# EAGLE board 24dc_cup_wash_sucction - Copy (EAGLE 8.5.1)
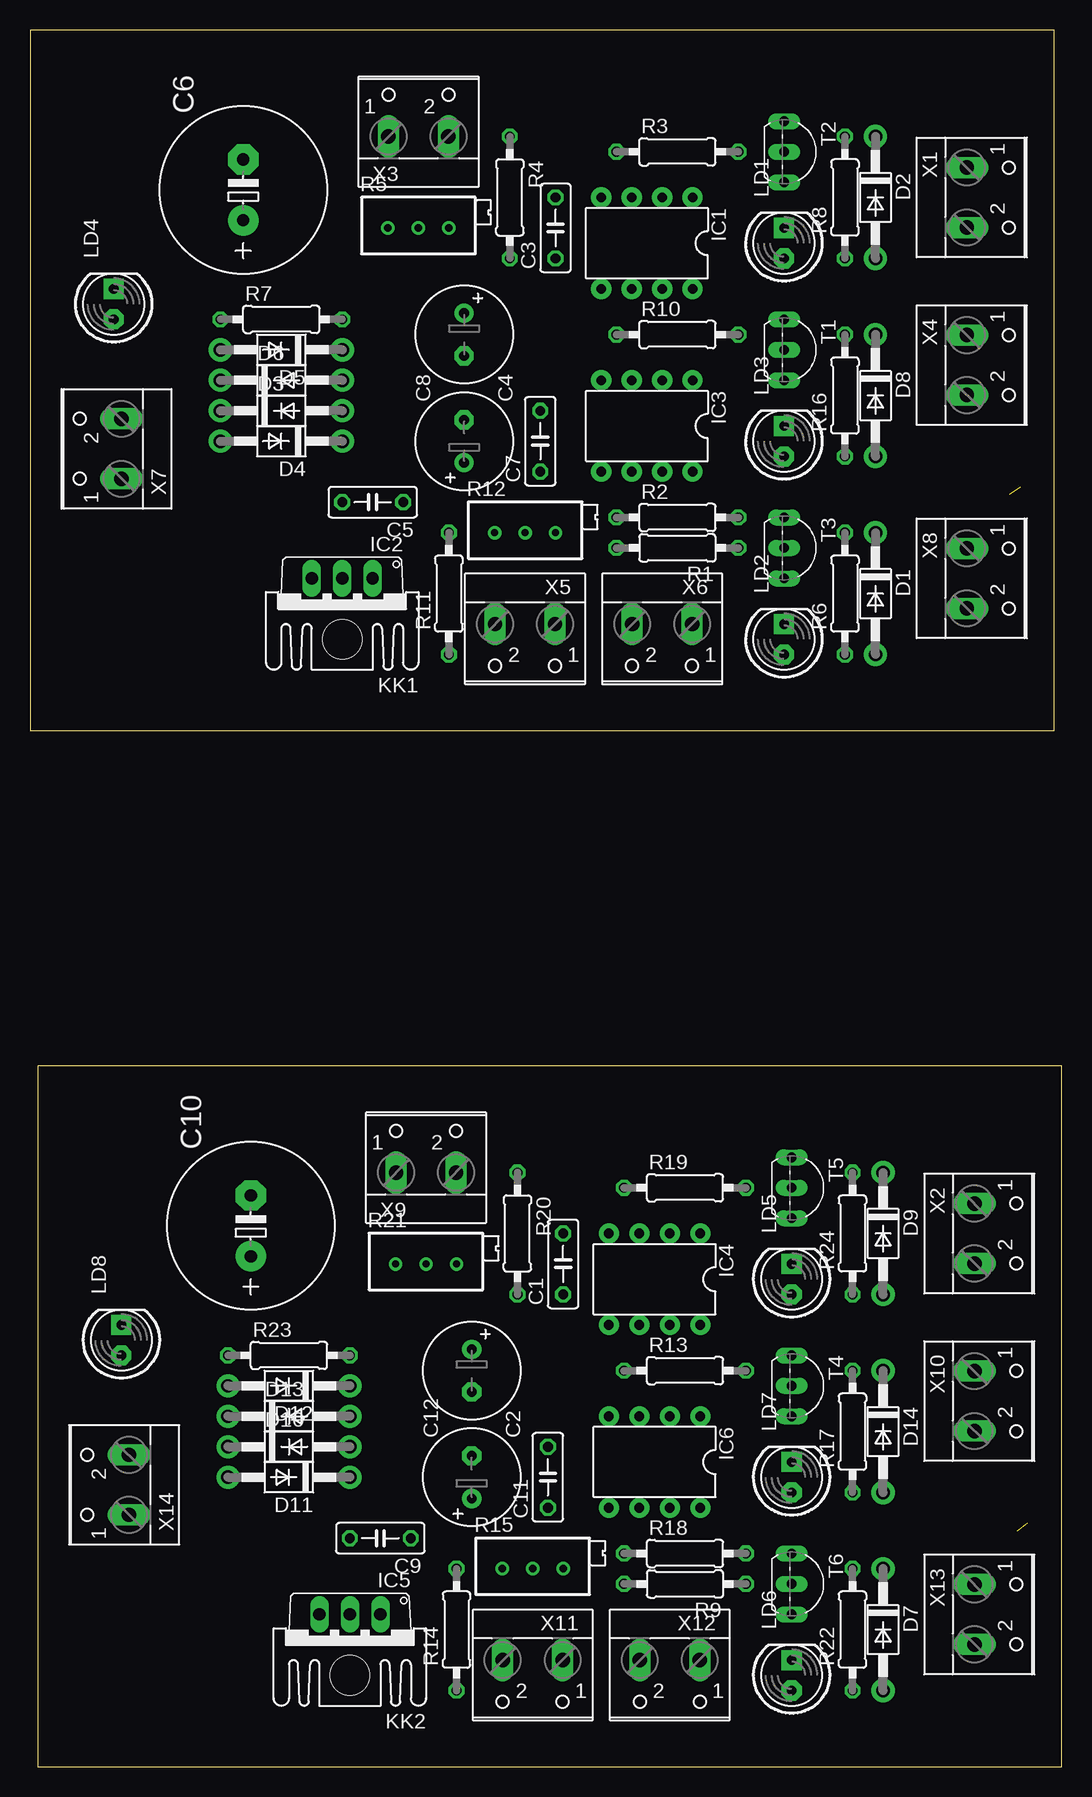
[diagram p0: board, top side]
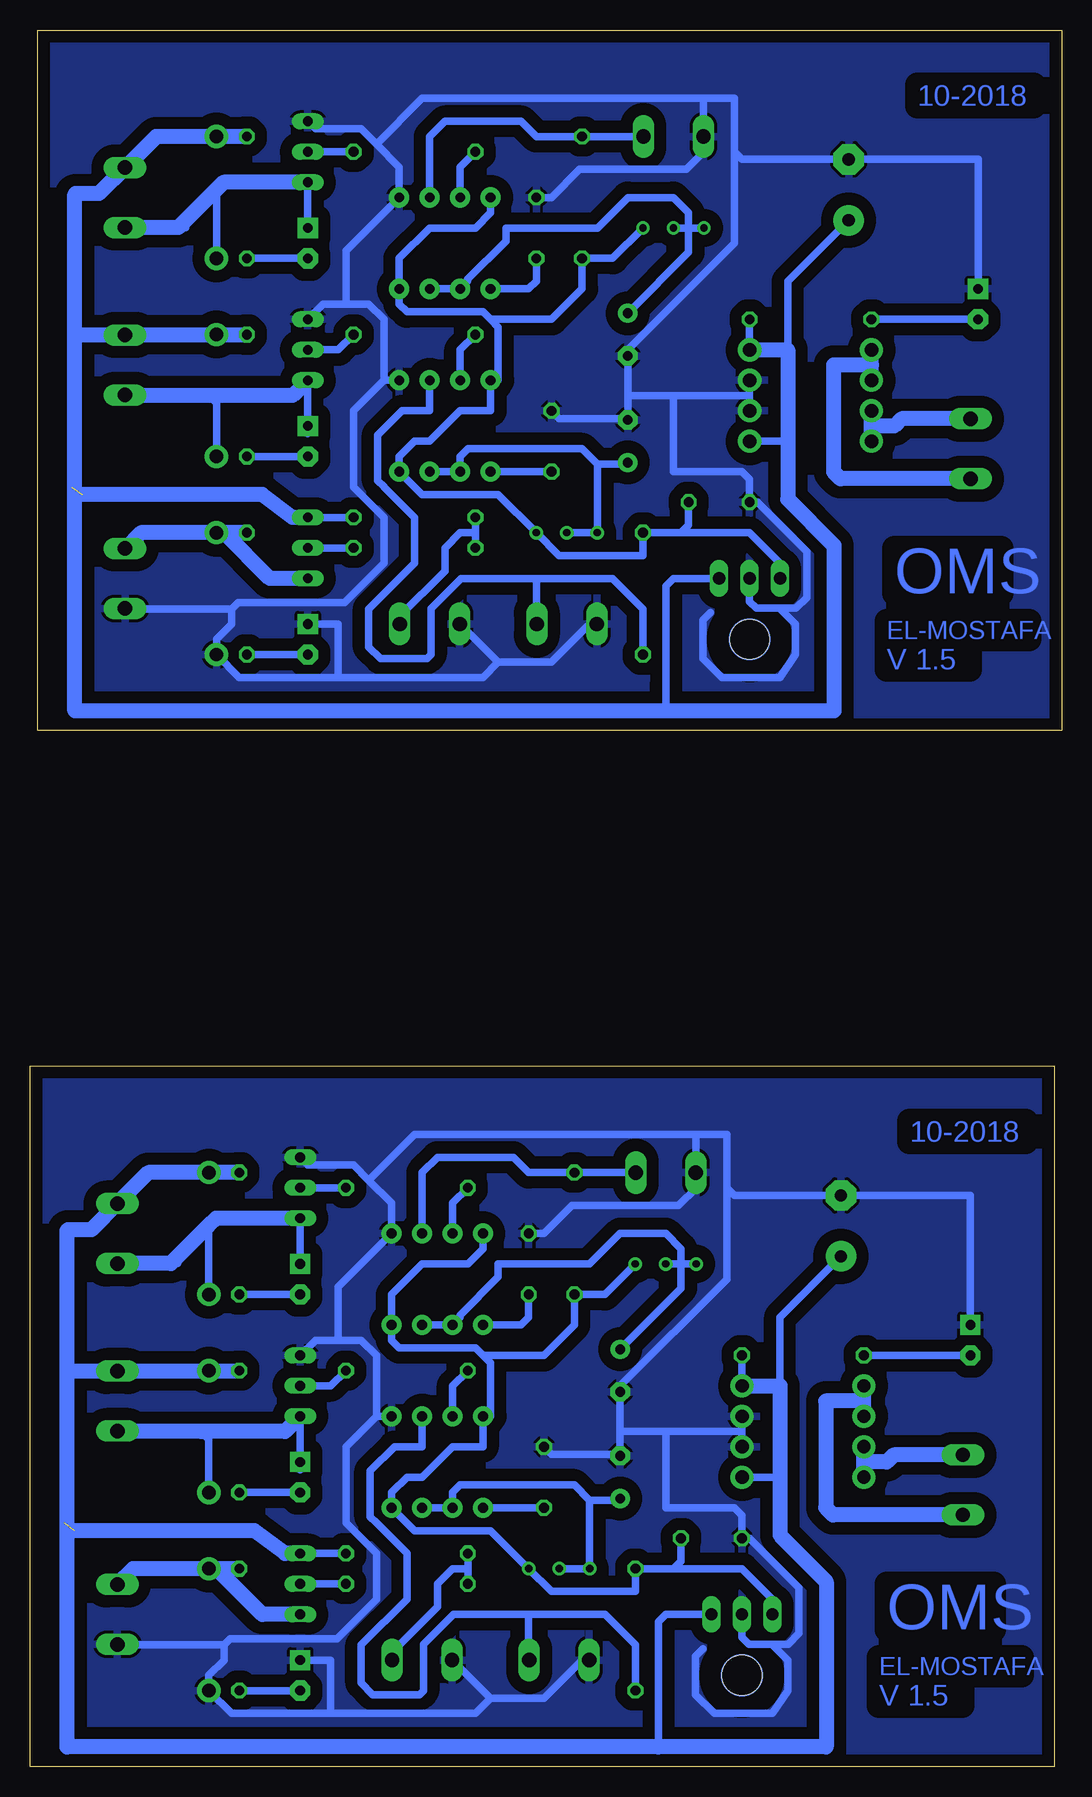
[diagram p1: board, bottom side, seen from below]

Size 86.03 x 144.77 mm. Coordinates in mm from the lower left corner, seen from the top.
Outline: 0,86.36 85.39,86.36 85.39,144.77 0,144.77 0,86.36
Outline: 0.64,0 86.03,0 86.03,58.41 0.64,58.41 0.64,0
Copper layers (1*16): Top 0.035mm / dielectric 1.5mm / Bottom 0.035mm
Design rules "default *": minimum track width 25mil, minimum drill 0.35mm, track to track 40mil, track to pad 40mil, pad to pad 6mil, via to via 6mil, smd to smd 6mil, copper to edge 40mil, drill to drill 6mil, minimum pad ring 10mil, minimum via ring 8mil, stop-mask expansion 4mil, vias tented up to drill 0mil, thermal gap 10mil

## Footprints (pad centres in the part's own frame; a part is rotated, then mirrored left to right if it is on the bottom)
C050-025X075 = drill 0.813 octagon: 1 -2.54,0; 2 2.54,0
E3,5-8 = drill 0.813 pad 1.6: + -1.778,0 | drill 0.813 pad 1.6 octagon: - 1.778,0
E5-13 = drill 1.016 pad 2.54: + -2.54,0 | drill 1.016 pad 2.54 octagon: - 2.54,0
DO41-10 = drill 1.118 pad 1.93: A 5.08,0; C -5.08,0
DIL08-ROUND = drill 0.813 pad 1.676: 1 -3.81,-3.81; 2 -1.27,-3.81; 3 1.27,-3.81; 4 3.81,-3.81; 5 3.81,3.81; 6 1.27,3.81; 7 -1.27,3.81; 8 -3.81,3.81
TO220V = drill 1.016 long: 1 -2.54,-2.54; 2 0,-2.54; 3 2.54,-2.54
SK95-2M3 = hole 3.302: 0,2.54
LED5MM = drill 0.813 pad 1.676 octagon: A -1.27,0 | drill 0.813 pad 1.676 square: K 1.27,0
0207/10 = drill 0.813 octagon: 1 -5.08,0; 2 5.08,0
RTRIMT93XA = drill 0.61: 1 0,-2.54; 2 0,0; 3 0,2.54
TO92-EBC-OVAL = drill 0.813 long: B 0,-1.27; C 2.54,-1.27; E -2.54,-1.27
TO92-EBC = drill 0.813 long: B 0,-1.27; C 2.54,-1.27; E -2.54,-1.27
W237-102 = drill 1.194 long: 1 -2.5,-1.27; 2 2.5,-1.27

## Placement (x,y rotation side)
C1  100nF  [C050-025X075]  44.45,41.91 90 top
C2  100uF  [E3,5-8]  36.83,33.02 270 top
C3  100nF  [C050-025X075]  43.81,128.27 90 top
C4  100uF  [E3,5-8]  36.2,119.38 270 top
C5  100nF  [C050-025X075]  28.57,105.41 180 top
C6  1000uF 50v  [E5-13]  17.78,131.44 90 top
C7  100nF  [C050-025X075]  42.55,110.49 90 top
C8  100uF  [E3,5-8]  36.2,110.49 90 top
C9  100nF  [C050-025X075]  29.21,19.05 180 top
C10  1000uF 50v  [E5-13]  18.41,45.08 90 top
C11  100nF  [C050-025X075]  43.18,24.13 90 top
C12  100uF  [E3,5-8]  36.83,24.13 90 top
D1  1N5817  [DO41-10]  70.48,97.79 270 top
D2  1N5817  [DO41-10]  70.48,130.81 270 top
D3  1N4007  [DO41-10]  20.95,113.03 0 top
D4  1N4007  [DO41-10]  20.95,110.49 180 top
D5  1N4007  [DO41-10]  20.95,118.11 180 top
D6  1N4007  [DO41-10]  20.95,115.57 0 top
D7  1N5817  [DO41-10]  71.12,11.43 270 top
D8  1N5817  [DO41-10]  70.48,114.3 270 top
D9  1N5817  [DO41-10]  71.12,44.45 270 top
D10  1N4007  [DO41-10]  21.59,26.67 0 top
D11  1N4007  [DO41-10]  21.59,24.13 180 top
D12  1N4007  [DO41-10]  21.59,31.75 180 top
D13  1N4007  [DO41-10]  21.59,29.21 0 top
D14  1N5817  [DO41-10]  71.12,27.94 270 top
IC1  NE555N  [DIL08-ROUND]  51.44,127 180 top
IC2  7812TV  [TO220V]  26.04,96.52 180 top
IC3  NE555N  [DIL08-ROUND]  51.44,111.76 180 top
IC4  NE555N  [DIL08-ROUND]  52.07,40.64 180 top
IC5  7812TV  [TO220V]  26.67,10.16 180 top
IC6  NE555N  [DIL08-ROUND]  52.07,25.4 180 top
KK1  SK95-2M3  [SK95-2M3]  26.04,96.52 180 top
KK2  SK95-2M3  [SK95-2M3]  26.67,10.16 180 top
LD1  [LED5MM]  62.87,127 90 top
LD2  [LED5MM]  62.87,93.98 90 top
LD3  [LED5MM]  62.87,110.49 90 top
LD4  [LED5MM]  6.99,121.92 90 top
LD5  [LED5MM]  63.5,40.64 90 top
LD6  [LED5MM]  63.5,7.62 90 top
LD7  [LED5MM]  63.5,24.13 90 top
LD8  [LED5MM]  7.62,35.56 90 top
R1  2.2k  [0207/10]  53.98,101.6 180 top
R2  10K  [0207/10]  53.98,104.14 0 top
R3  2.2k  [0207/10]  53.98,134.62 0 top
R4  10K  [0207/10]  40.01,130.81 270 top
R5  100k  [RTRIMT93XA]  32.38,128.27 270 top
R6  10k  [0207/10]  67.94,97.79 90 top
R7  10k  [0207/10]  20.95,120.65 0 top
R8  10k  [0207/10]  67.94,130.81 90 top
R9  2.2k  [0207/10]  54.61,15.24 180 top
R10  2.2k  [0207/10]  53.98,119.38 0 top
R11  10K  [0207/10]  34.92,97.79 90 top
R12  100k  [RTRIMT93XA]  41.27,102.87 270 top
R13  2.2k  [0207/10]  54.61,33.02 0 top
R14  10K  [0207/10]  35.56,11.43 90 top
R15  100k  [RTRIMT93XA]  41.91,16.51 270 top
R16  10k  [0207/10]  67.94,114.3 90 top
R17  10k  [0207/10]  68.58,27.94 90 top
R18  10K  [0207/10]  54.61,17.78 0 top
R19  2.2k  [0207/10]  54.61,48.26 0 top
R20  10K  [0207/10]  40.64,44.45 270 top
R21  100k  [RTRIMT93XA]  33.02,41.91 270 top
R22  10k  [0207/10]  68.58,11.43 90 top
R23  10k  [0207/10]  21.59,34.29 0 top
R24  10k  [0207/10]  68.58,44.45 90 top
T1  2N5551  [TO92-EBC-OVAL]  64.14,118.11 270 top
T2  2N5551  [TO92-EBC-OVAL]  64.14,134.62 270 top
T3  2N5401  [TO92-EBC]  64.14,101.6 270 top
T4  2N5551  [TO92-EBC-OVAL]  64.77,31.75 270 top
T5  2N5551  [TO92-EBC-OVAL]  64.77,48.26 270 top
T6  2N5401  [TO92-EBC]  64.77,15.24 270 top
X1  [W237-102]  79.38,130.81 270 top
X2  [W237-102]  80.01,44.45 270 top
X3  [W237-102]  32.38,137.16 0 top
X4  [W237-102]  79.38,116.84 270 top
X5  [W237-102]  41.27,93.98 180 top
X6  [W237-102]  52.7,93.98 180 top
X7  [W237-102]  6.35,109.85 90 top
X8  [W237-102]  79.38,99.06 270 top
X9  [W237-102]  33.02,50.8 0 top
X10  [W237-102]  80.01,30.48 270 top
X11  [W237-102]  41.91,7.62 180 top
X12  [W237-102]  53.34,7.62 180 top
X13  [W237-102]  80.01,12.7 270 top
X14  [W237-102]  6.99,23.49 90 top

## Library data of the parts
C1-C12 = rcl; SPICEPREFIX: C
D1-D14 IC1 IC3 IC4 IC6 T1 T2 T4 T5 = adafruit
IC2 IC5 = linear
KK1 KK2 = heatsink
LD1-LD8 = led
R1-R4 R6-R11 R13 R14 R16-R20 R22-R24 = rcl-2
R5 R12 R15 R21 = rcl; SPICEMODEL: X; SPICEPREFIXL: POT
T3 T6 = transistor-neu-to92
X1-X14 = con-wago-500

## Nets
12VDC: C5.1 IC1.4 IC1.8 IC2.3 IC3.4 IC3.8 R4.2 R5.3 R11.2 R12.3
12VDC1: C9.1 IC4.4 IC4.8 IC5.3 IC6.4 IC6.8 R14.2 R15.3 R20.2 R21.3
12VDC_IN: C6.+ D2.C D4.C D5.C D8.C IC2.1 R2.2 R7.2 R8.2 R16.2 T3.E X1.1 X4.1
12VDC_IN1: C10.+ D9.C D11.C D12.C D14.C IC5.1 R17.2 R18.2 R23.2 R24.2 T6.E X2.1 X10.1
AC1-1: D12.A D13.C X14.1
AC1-24: D5.A D6.C X7.1
AC2-1: D10.C D11.A X14.2
AC2-24: D3.C D4.A X7.2
CUP: IC1.2 R4.1 X3.2
CUP1: IC4.2 R20.1 X9.2
GND: C3.2 C4.- C5.2 C6.- C7.2 C8.- D1.A D3.A D6.A IC1.1 IC2.2 IC3.1 LD2.K LD4.K T1.E T2.E X3.1 X5.2 X6.2 X8.2
GND1: C1.2 C2.- C9.2 C10.- C11.2 C12.- D7.A D10.A D13.A IC4.1 IC5.2 IC6.1 LD6.K LD8.K T4.E T5.E X9.1 X11.2 X12.2 X13.2
N$1: R3.2 T2.B
N$2: C3.1 IC1.5
N$3: D2.A LD1.K T2.C X1.2
N$4: LD8.A R23.1
N$5: C7.1 IC3.5
N$6: LD1.A R8.1
N$7: R1.1 T3.B
N$8: LD4.A R7.1
N$9: LD2.A R6.1
N$10: C1.1 IC4.5
N$11: D8.A LD3.K T1.C X4.2
N$12: R10.2 T1.B
N$13: D9.A LD5.K T5.C X2.2
N$14: LD3.A R16.1
N$15: R19.2 T5.B
N$16: LD5.A R24.1
N$17: C11.1 IC6.5
N$18: D14.A LD7.K T4.C X10.2
N$19: R13.2 T4.B
N$20: LD7.A R17.1
N$21: R9.1 T6.B
N$22: LD6.A R22.1
NS1: D1.C R6.2 T3.C X8.1
NS2: D7.C R22.2 T6.C X13.1
OUT_CUP: IC1.3 R3.1
OUT_CUP1: IC4.3 R19.1
OUT_WASH: IC3.3 R10.1
OUT_WASH1: IC6.3 R13.1
S_CUP: C4.+ IC1.6 IC1.7 R5.1 R5.2
S_CUP1: C2.+ IC4.6 IC4.7 R21.1 R21.2
S_WASH: C8.+ IC3.6 IC3.7 R12.1 R12.2
S_WASH1: C12.+ IC6.6 IC6.7 R15.1 R15.2
SUC: R1.2 R2.1 X6.1
SUC1: R9.2 R18.1 X12.1
WASH: IC3.2 R11.1 X5.1
WASH1: IC6.2 R14.1 X11.1

## Tracks (layer width: path | path; a pad name or v marks a point on that pad's centre or on a via)
12VDC
  Bottom 0.635: 47.62,120.65 46.99,120.01 46.99,115.57 IC3.4 47.62,113.03 50.16,113.03 52.7,110.49 53.98,110.49 55.24,109.22 IC3.8 53.34,106.04 46.99,106.04 R12.3 41.91,100.97 34.92,100.97 R11.2 31.75,102.87 | 47.62,120.65 48.26,121.28 54.61,121.28 55.24,121.92 IC1.8 55.24,125.73 52.7,128.27 48.9,128.27 47.62,129.54 IC1.4 | IC2.3 23.5,100.33 26.04,102.87 31.75,102.87 | R5.3 37.47,125.73 R4.2 40.01,123.19 42.55,120.65 47.62,120.65 | C5.1 31.11,103.5 31.75,102.87
12VDC1
  Bottom 0.635: 48.26,34.29 47.62,33.65 47.62,29.21 IC6.4 48.26,26.67 50.8,26.67 53.34,24.13 54.61,24.13 55.88,22.86 IC6.8 53.98,19.69 47.62,19.69 R15.3 42.55,14.6 35.56,14.6 R14.2 32.38,16.51 | 48.26,34.29 48.9,34.92 55.24,34.92 55.88,35.56 IC4.8 55.88,39.37 53.34,41.91 49.53,41.91 48.26,43.18 IC4.4 | IC5.3 24.13,13.97 26.67,16.51 32.38,16.51 | R21.3 38.1,39.37 R20.2 40.64,36.83 43.18,34.29 48.26,34.29 | C9.1 31.75,17.14 32.38,16.51
12VDC_IN  (1 unrouted)
  Bottom 0.635: R8.2 D2.C 75.53,135.89 | T3.E R2.2 | R16.2 D8.C 70.53,119.34 X4.1 78.06,119.38 | IC2.1 32.38,99.06 33.02,98.42 33.02,90.17 33.02,89.6 33.02,88.01 | 19.05,89.6 19.05,101.6 22.86,105.41 22.86,110.49 | 22.86,110.49 22.86,118.11 22.86,123.82 C6.+ | D4.C 22.86,110.49 | R7.2 D5.C | 82.23,131.13 82.55,130.81 82.55,119.38 | 82.55,106.68 82.55,119.38 | 78.06,119.38 77.47,119.38 | 78.06,119.38 82.3,119.38 82.55,119.38
  Bottom 1.27: D5.C 22.86,118.11 22.86,105.65 19,101.79 19,88.01 33.02,88.01 82.3,88.01 82.3,119.38 | 82.3,119.38 82.3,131.06 82.23,131.13 80.29,131.13 X1.1 75.53,135.89 R8.2 | T3.E 64.14,104.14 66.67,106.04 81.66,106.04 | 82.3,119.38 R16.2
12VDC_IN1  (1 unrouted)
  Bottom 0.635: R24.2 D9.C 76.16,49.53 | T6.E R18.2 | R17.2 D14.C 71.16,32.98 X10.1 78.7,33.02 | 33.66,1.65 33.66,12.06 33.02,12.7 IC5.1 | 19.68,3.24 19.68,15.24 23.5,19.05 23.5,24.13 | 23.5,24.13 23.5,31.75 23.5,37.46 C10.+ | D11.C 23.5,24.13 | R23.2 D12.C | 82.87,44.77 83.19,44.45 83.19,33.02 | 83.19,20.32 83.19,33.02 | 78.7,33.02 78.11,33.02 | 78.7,33.02 82.93,33.02 83.19,33.02
  Bottom 1.27: D12.C 23.5,31.75 23.5,19.29 19.64,15.44 19.64,1.65 33.66,1.65 82.93,1.65 82.93,33.02 | 82.93,33.02 82.93,44.7 82.87,44.77 80.92,44.77 X2.1 76.16,49.53 R24.2 | T6.E 64.77,17.78 67.31,19.69 82.3,19.69 | 82.93,33.02 R17.2
AC1-1
  Bottom 0.635: D13.C 16.51,30.48 D12.A
  Bottom 1.27: X14.1 19.09,20.99 19.68,21.59 19.68,30.48 16.51,30.48 | D13.C D12.A
AC1-24
  Bottom 0.635: D6.C 15.88,116.84 D5.A
  Bottom 1.27: X7.1 18.45,107.35 19.05,107.95 19.05,116.84 15.88,116.84 | D6.C D5.A
AC2-1
  Bottom 0.635: D10.C 16.51,26.59 16.51,25.4 D11.A
  Bottom 1.27: X14.2 14.01,25.99 14.61,25.4 16.51,25.4 | D11.A 16.51,26.59
AC2-24
  Bottom 0.635: D3.C 15.88,112.95 15.88,111.76 D4.A
  Bottom 1.27: X7.2 13.38,112.35 13.97,111.76 15.88,111.76 | D4.A 15.88,112.95
CUP
  Bottom 0.635: IC1.2 52.7,135.89 51.44,137.16 45.09,137.16 43.81,135.89 R4.1 X3.2
CUP1
  Bottom 0.635: IC4.2 53.34,49.53 52.07,50.8 45.72,50.8 44.45,49.53 R20.1 X9.2
GND
  Bottom 0.635: 46.99,92.07 42.55,92.07 39.37,95.25 X5.2 | 46.99,92.07 50.16,95.25 X6.2 | T2.E 62.23,136.53 58.42,136.53 57.15,135.25 | 57.15,135.25 55.24,133.35 IC1.1 59.69,126.36 59.69,121.92 | C7.2 41.91,112.39 36.2,112.39 | 36.2,112.39 36.2,114.3 | 36.2,114.3 C4.- 36.2,118.11 27.3,127 27.3,134.62 | 36.2,112.39 C8.- | 36.2,114.3 32.38,114.3 | 57.15,135.25 53.34,139.06 29.84,139.06 | 29.84,139.06 27.3,139.06 27.3,134.62 | 32.38,114.3 32.38,107.95 26.67,107.95 26.04,107.31 C5.2 25.4,105.41 21.27,101.28 21.27,97.47 22.16,96.58 23.56,96.58 | 29.84,139.06 29.89,139.03 X3.1 29.89,134.66 29.84,134.62 31.32,133.15 40.21,133.15 42.55,130.81 C3.2 | 56.52,115.57 59.05,113.03 59.05,106.68 56.52,104.14 56.52,100.33 59.8,97.04 68.69,97.04 69.22,96.52 | 56.52,115.57 IC3.1 | 69.22,96.52 69.22,95.25 70.48,93.98 D1.A 68.58,90.8 60.33,90.8 | 46.99,92.07 48.26,90.8 60.33,90.8 | LD2.K 60.33,95.25 60.33,90.8 | 56.52,115.57 56.52,120.65 57.78,121.92 59.69,121.92 | D6.A 26.04,114.3 | 26.04,114.3 D3.A | 26.04,114.3 32.38,114.3 | X8.2 78.06,96.52 69.22,96.52 | LD4.K 6.99,133.98 C6.- 26.67,133.98 27.3,134.62 | 59.69,121.92 61.59,121.92 T1.E | 29.29,96.2 29.91,95.58 29.91,92.38 28.34,90.8 23.5,90.8 22.23,92.71 22.23,95.25 23.56,96.58 | 23.56,96.58 25.48,96.58 26.04,97.14 IC2.2
  pour Bottom: 0,144.78 85.09,144.78 85.09,86.36 0,86.36
GND1
  Bottom 0.635: 47.62,5.71 43.18,5.71 40.01,8.89 X11.2 | 47.62,5.71 50.8,8.89 X12.2 | T5.E 62.87,50.16 59.05,50.16 57.78,48.89 | 57.78,48.89 55.88,46.99 IC4.1 60.33,40 60.33,35.56 | C11.2 42.55,26.03 36.83,26.03 | 36.83,26.03 36.83,27.94 | 36.83,27.94 C2.- 36.83,31.75 27.94,40.64 27.94,48.26 | 36.83,26.03 C12.- | 36.83,27.94 33.02,27.94 | 57.78,48.89 53.98,52.7 30.48,52.7 | 30.48,52.7 27.94,52.7 27.94,48.26 | 33.02,27.94 33.02,21.59 27.3,21.59 26.67,20.95 C9.2 26.04,19.05 21.91,14.92 21.91,11.11 22.8,10.22 24.19,10.22 | 30.48,52.7 30.52,52.66 X9.1 30.52,48.3 30.48,48.26 31.95,46.79 40.84,46.79 43.18,44.45 C1.2 | 57.15,29.21 59.69,26.67 59.69,20.32 57.15,17.78 57.15,13.97 60.44,10.68 69.33,10.68 69.85,10.16 | 57.15,29.21 IC6.1 | 69.85,10.16 69.85,8.89 71.12,7.62 D7.A 69.22,4.44 60.96,4.44 | 47.62,5.71 48.9,4.44 60.96,4.44 | LD6.K 60.96,8.89 60.96,4.44 | 57.15,29.21 57.15,34.29 58.42,35.56 60.33,35.56 | D13.A 26.67,27.94 | 26.67,27.94 D10.A | 26.67,27.94 33.02,27.94 | X13.2 78.7,10.16 69.85,10.16 | LD8.K 7.62,47.62 C10.- 27.3,47.62 27.94,48.26 | 60.33,35.56 62.23,35.56 T4.E | 29.93,9.84 30.54,9.22 30.54,6.02 28.97,4.44 24.13,4.44 22.86,6.35 22.86,8.89 24.19,10.22 | 24.19,10.22 26.11,10.22 26.67,10.78 IC5.2
  pour Bottom: 0.64,58.42 85.72,58.42 85.72,0 0.64,0
N$1
  Bottom 0.635: R3.2 T2.B
N$2
  Bottom 0.635: C3.1 43.81,123.82 44.45,123.19 IC1.5
N$3
  Bottom 0.635: LD1.K T2.C | 73.66,128.31 73.06,128.31 | D2.A 70.48,131.44 70.5,131.47
  Bottom 1.27: T2.C 69.89,132.08 70.5,131.47 73.66,128.31 X1.2
N$4
  Bottom 0.635: R23.1 LD8.A
N$5
  Bottom 0.635: IC3.5 C7.1
N$6
  Bottom 0.635: LD1.A R8.1
N$7
  Bottom 0.635: T3.B R1.1
N$8
  Bottom 0.635: R7.1 LD4.A
N$9
  Bottom 0.635: LD2.A R6.1
N$10
  Bottom 0.635: C1.1 44.45,37.46 45.09,36.83 IC4.5
N$11
  Bottom 0.635: T1.C LD3.K 62.87,111.12 | 75.61,114.34 X4.2 | D8.A 70.48,113.66 71.12,114.3
  Bottom 1.27: T1.C 64.14,114.3 71.12,114.3 78.14,114.3 | 78.74,114.3 78.14,114.3 | 78.14,114.3 X4.2
N$12
  Bottom 0.635: R10.2 60.33,118.11 T1.B
N$13
  Bottom 0.635: LD5.K T5.C | 74.3,41.95 73.7,41.95 | D9.A 71.12,45.08 71.14,45.1
  Bottom 1.27: T5.C 70.53,45.72 71.14,45.1 74.3,41.95 X2.2
N$14
  Bottom 0.635: LD3.A R16.1
N$15
  Bottom 0.635: R19.2 T5.B
N$16
  Bottom 0.635: LD5.A R24.1
N$17
  Bottom 0.635: IC6.5 C11.1
N$18
  Bottom 0.635: T4.C LD7.K 63.5,24.76 | 76.24,27.98 X10.2 | D14.A 71.12,27.3 71.75,27.94
  Bottom 1.27: T4.C 64.77,27.94 71.75,27.94 78.78,27.94 | 79.38,27.94 78.78,27.94 | 78.78,27.94 X10.2
N$19
  Bottom 0.635: R13.2 60.96,31.75 T4.B
N$20
  Bottom 0.635: LD7.A R17.1
N$21
  Bottom 0.635: T6.B R9.1
N$22
  Bottom 0.635: LD6.A R22.1
NS1
  Bottom 1.27: T3.C 66.04,99.06 69.85,102.87 | 69.85,102.87 D1.C 76.8,102.87 X8.1 | R6.2 69.85,102.87
NS2
  Bottom 1.27: T6.C 66.67,12.7 70.48,16.51 | 70.48,16.51 D7.C 77.43,16.51 X13.1 | R22.2 70.48,16.51
OUT_CUP
  Bottom 0.635: R3.1 50.16,133.35 IC1.3
OUT_CUP1
  Bottom 0.635: R19.1 50.8,46.99 IC4.3
OUT_WASH
  Bottom 0.635: IC3.3 50.16,118.11 R10.1
OUT_WASH1
  Bottom 0.635: IC6.3 50.8,31.75 R13.1
S_CUP
  Bottom 0.635: IC1.7 IC1.6 49.54,123.81 49.54,123.98 46.35,127.17 46.35,128.27 38.73,128.27 36.2,130.81 32.38,130.81 31.11,129.54 31.11,128.27 | 31.11,128.27 R5.2 | R5.1 31.11,128.27 | 31.11,128.27 31.11,126.24 C4.+
S_CUP1
  Bottom 0.635: IC4.7 IC4.6 50.18,37.45 50.18,37.62 46.99,40.81 46.99,41.91 39.37,41.91 36.83,44.45 33.02,44.45 31.75,43.18 31.75,41.91 | 31.75,41.91 R21.2 | R21.1 31.75,41.91 | 31.75,41.91 31.75,39.88 C2.+
S_WASH
  Bottom 0.635: IC3.7 IC3.6 50.16,109.22 49.53,109.85 40.01,109.85 38.73,108.58 | R12.2 R12.1 38.73,108.58 | 38.73,108.58 36.2,108.58 C8.+
S_WASH1
  Bottom 0.635: IC6.7 IC6.6 50.8,22.86 50.16,23.49 40.64,23.49 39.37,22.22 | R15.2 R15.1 39.37,22.22 | 39.37,22.22 36.83,22.22 C12.+
SUC
  Bottom 0.635: R2.1 48.9,102.87 | 48.9,102.87 R1.2 | 48.9,102.87 50.16,102.87 51.44,101.6 51.44,99.68 55.24,95.87 55.24,95.25 X6.1
SUC1
  Bottom 0.635: R18.1 49.53,16.51 | 49.53,16.51 R9.2 | 49.53,16.51 50.8,16.51 52.07,15.24 52.07,13.32 55.88,9.51 55.88,8.89 X12.1
WASH
  Bottom 0.635: R11.1 34.92,96.52 37.47,99.06 43.81,99.06 | 43.77,96.56 X5.1 43.81,95.29 43.81,99.06 | IC3.2 52.7,113.03 55.02,113.03 57.04,111.01 57.04,107.21 56.52,106.69 56.52,106.68 53.98,104.14 53.98,100.33 57.78,96.52 57.78,93.34 56.82,92.38 52.93,92.38 52.6,92.71 52.6,96.55 50.08,99.06 43.81,99.06
WASH1
  Bottom 0.635: R14.1 35.56,10.16 38.1,12.7 44.45,12.7 | 44.41,10.2 X11.1 44.45,8.93 44.45,12.7 | IC6.2 53.34,26.67 55.65,26.67 57.67,24.65 57.67,20.85 57.15,20.33 57.15,20.32 54.61,17.78 54.61,13.97 58.42,10.16 58.42,6.98 57.45,6.02 53.56,6.02 53.23,6.35 53.23,10.19 50.72,12.7 44.45,12.7
(copper drawn outside any net)
  shapes: Bottom circle x2

## Text on the board
Bottom: 10-2018 | OMS | EL-MOSTAFA | V 1.5 | 10-2018 | OMS | EL-MOSTAFA | V 1.5